# Altium PCB PCB1.PcbDoc
Units mm, origin at the board's own origin, x right, y up, seen from the top; angles counter-clockwise.
Board outline 60 x 47.5 mm, 4 copper layers (Top Layer, GND1, GND2, Bottom Layer), stack 1.57 mm thick; 73 components, 58 nets, 277 pads, 166 vias.
Unrouted connection lines stored in the file: 8.
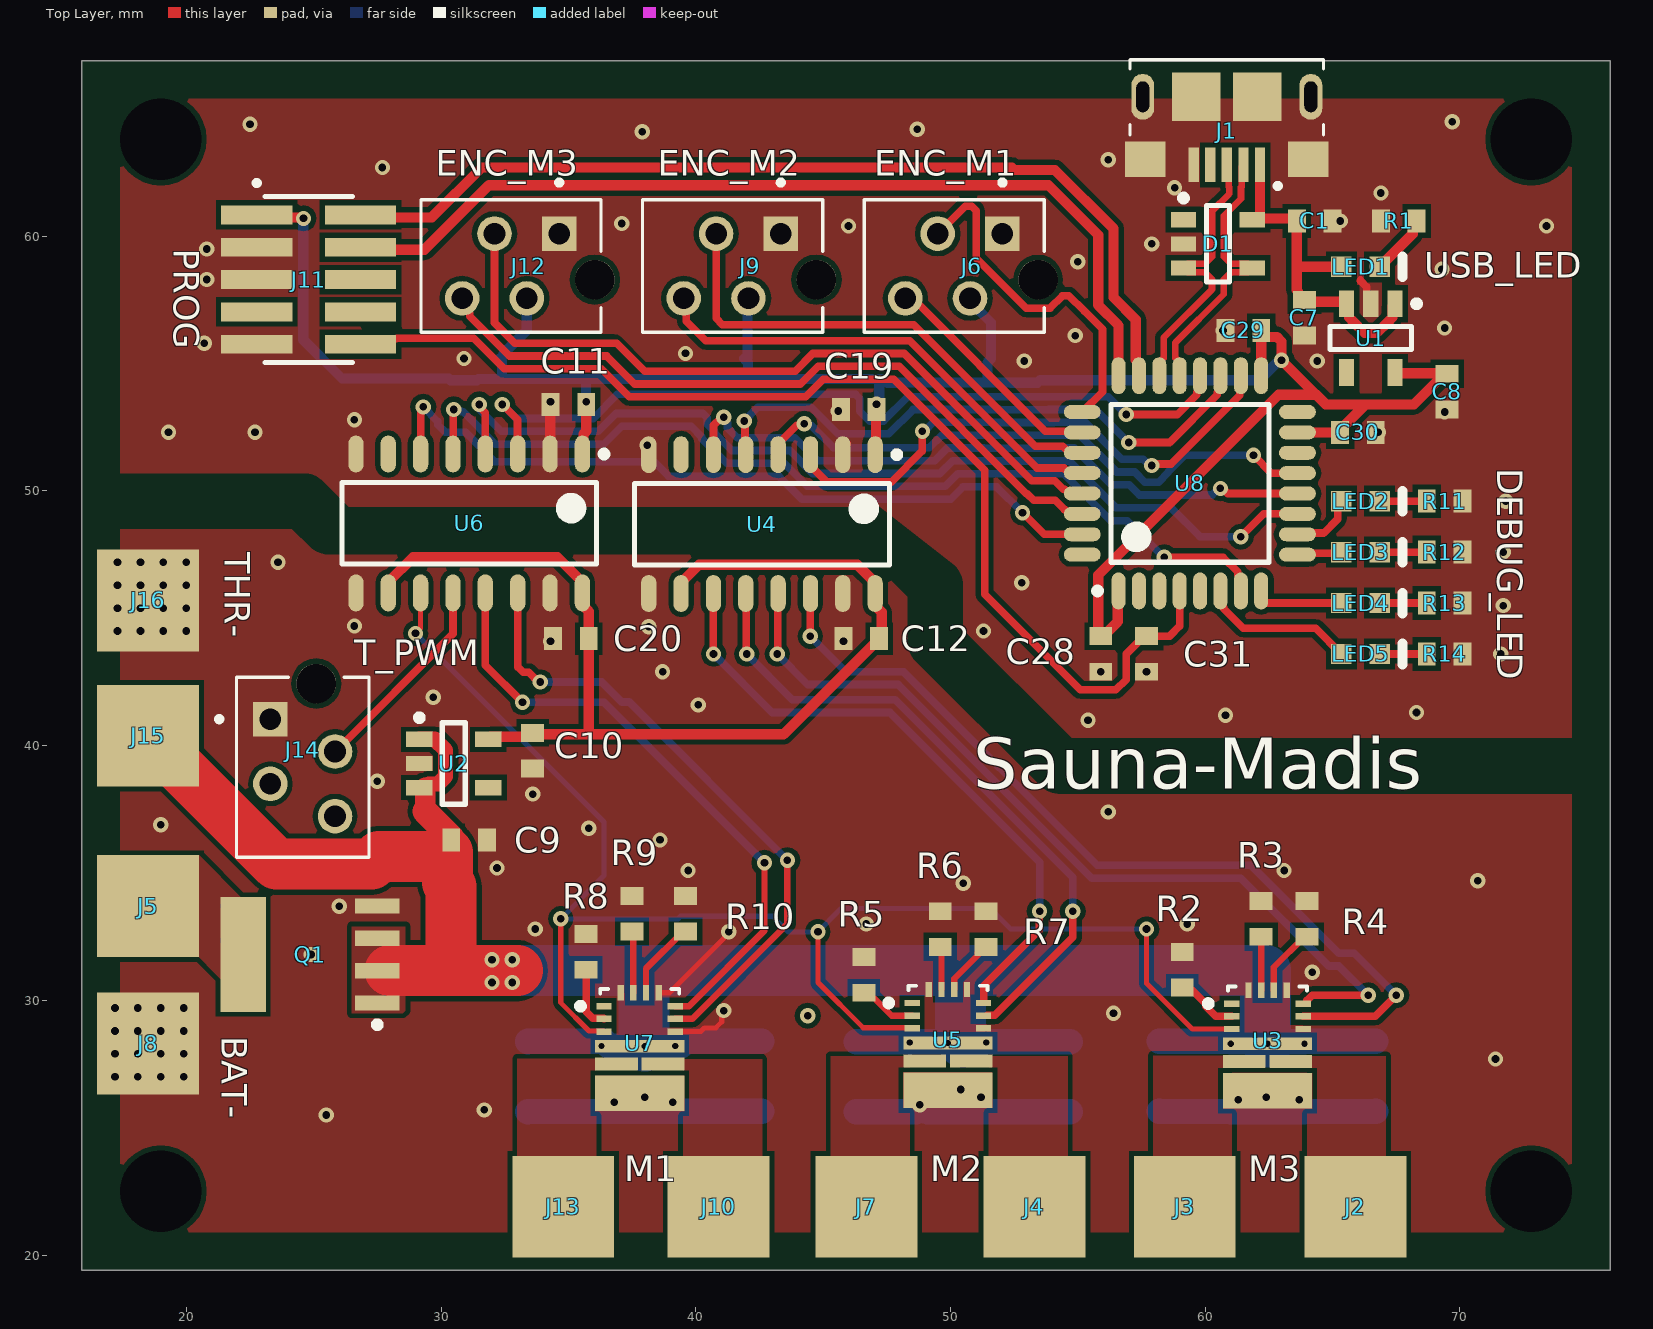
[diagram p0: Top Layer view]
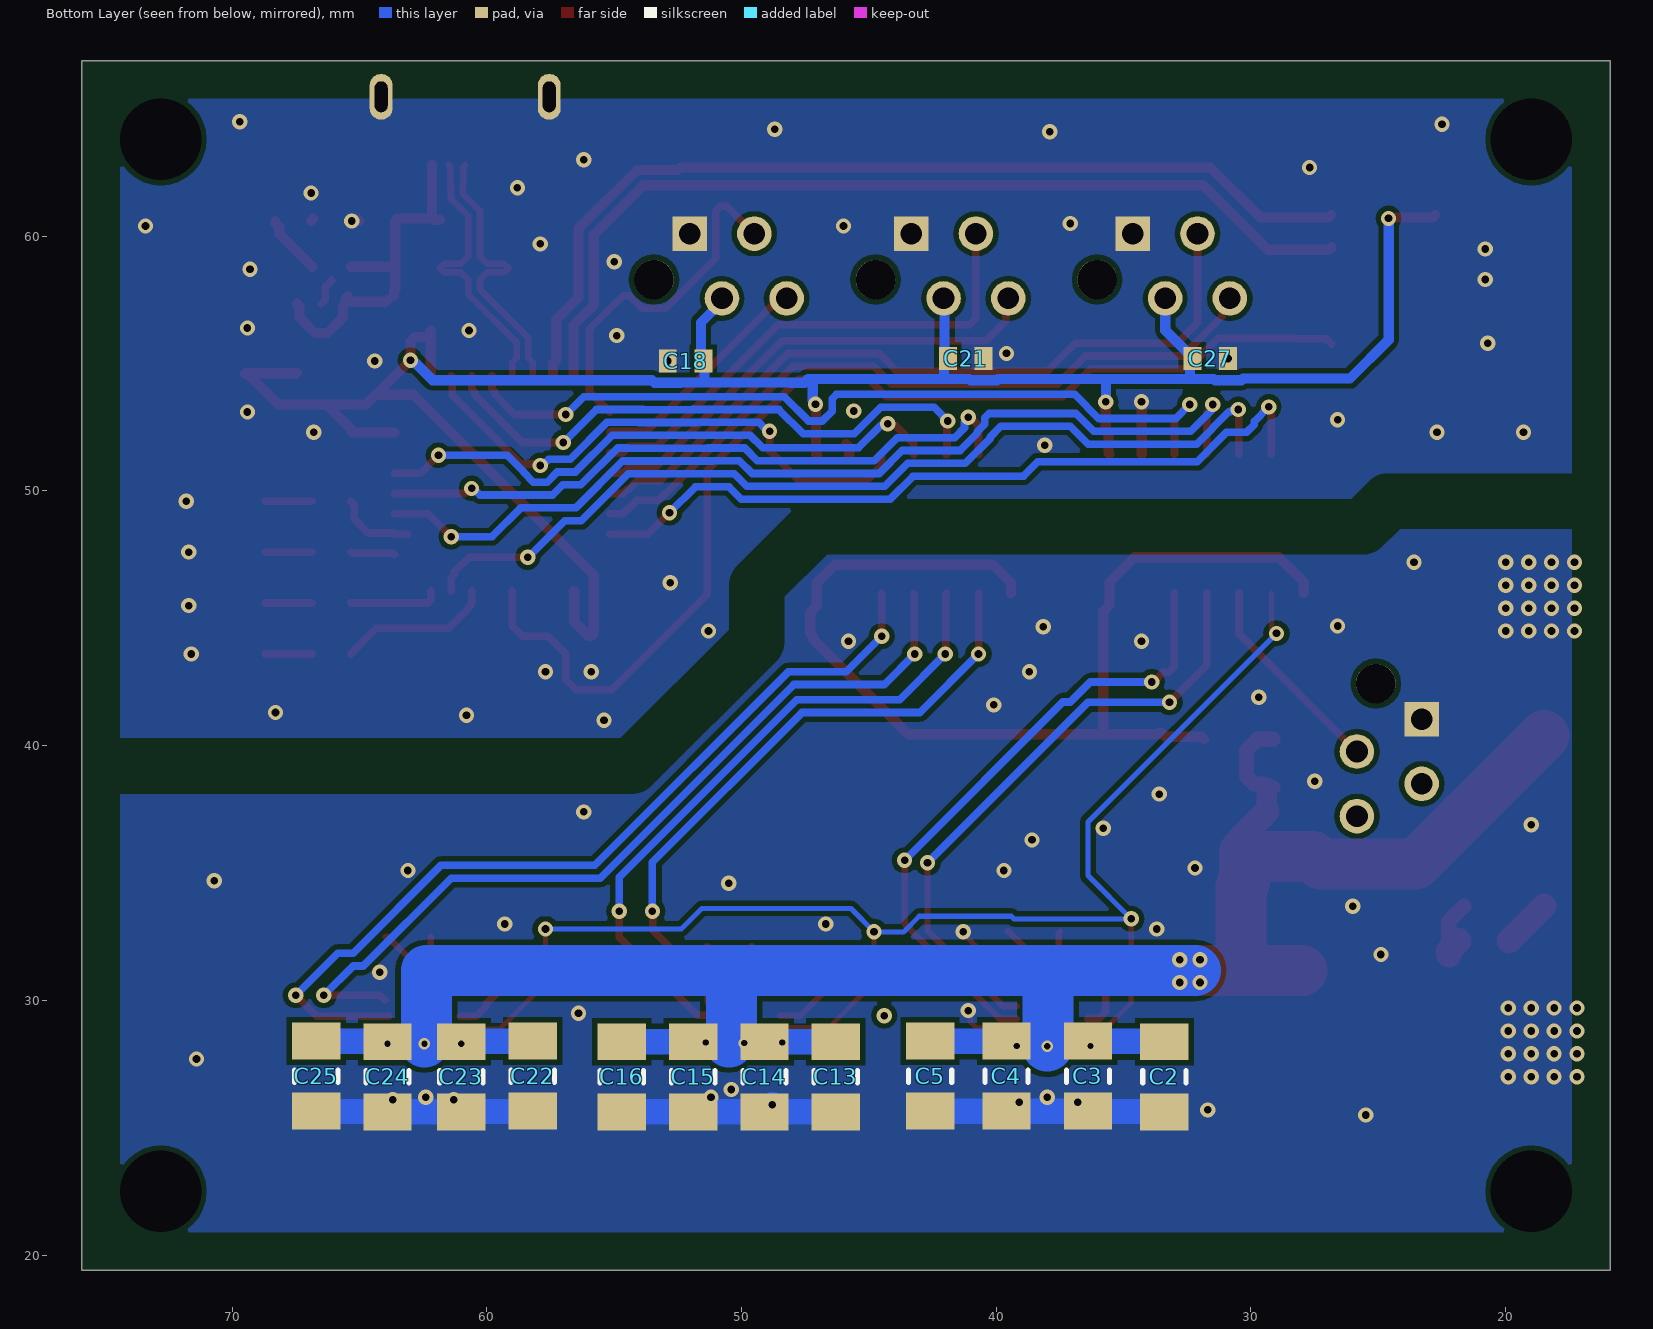
[diagram p1: Bottom Layer view, seen from below]
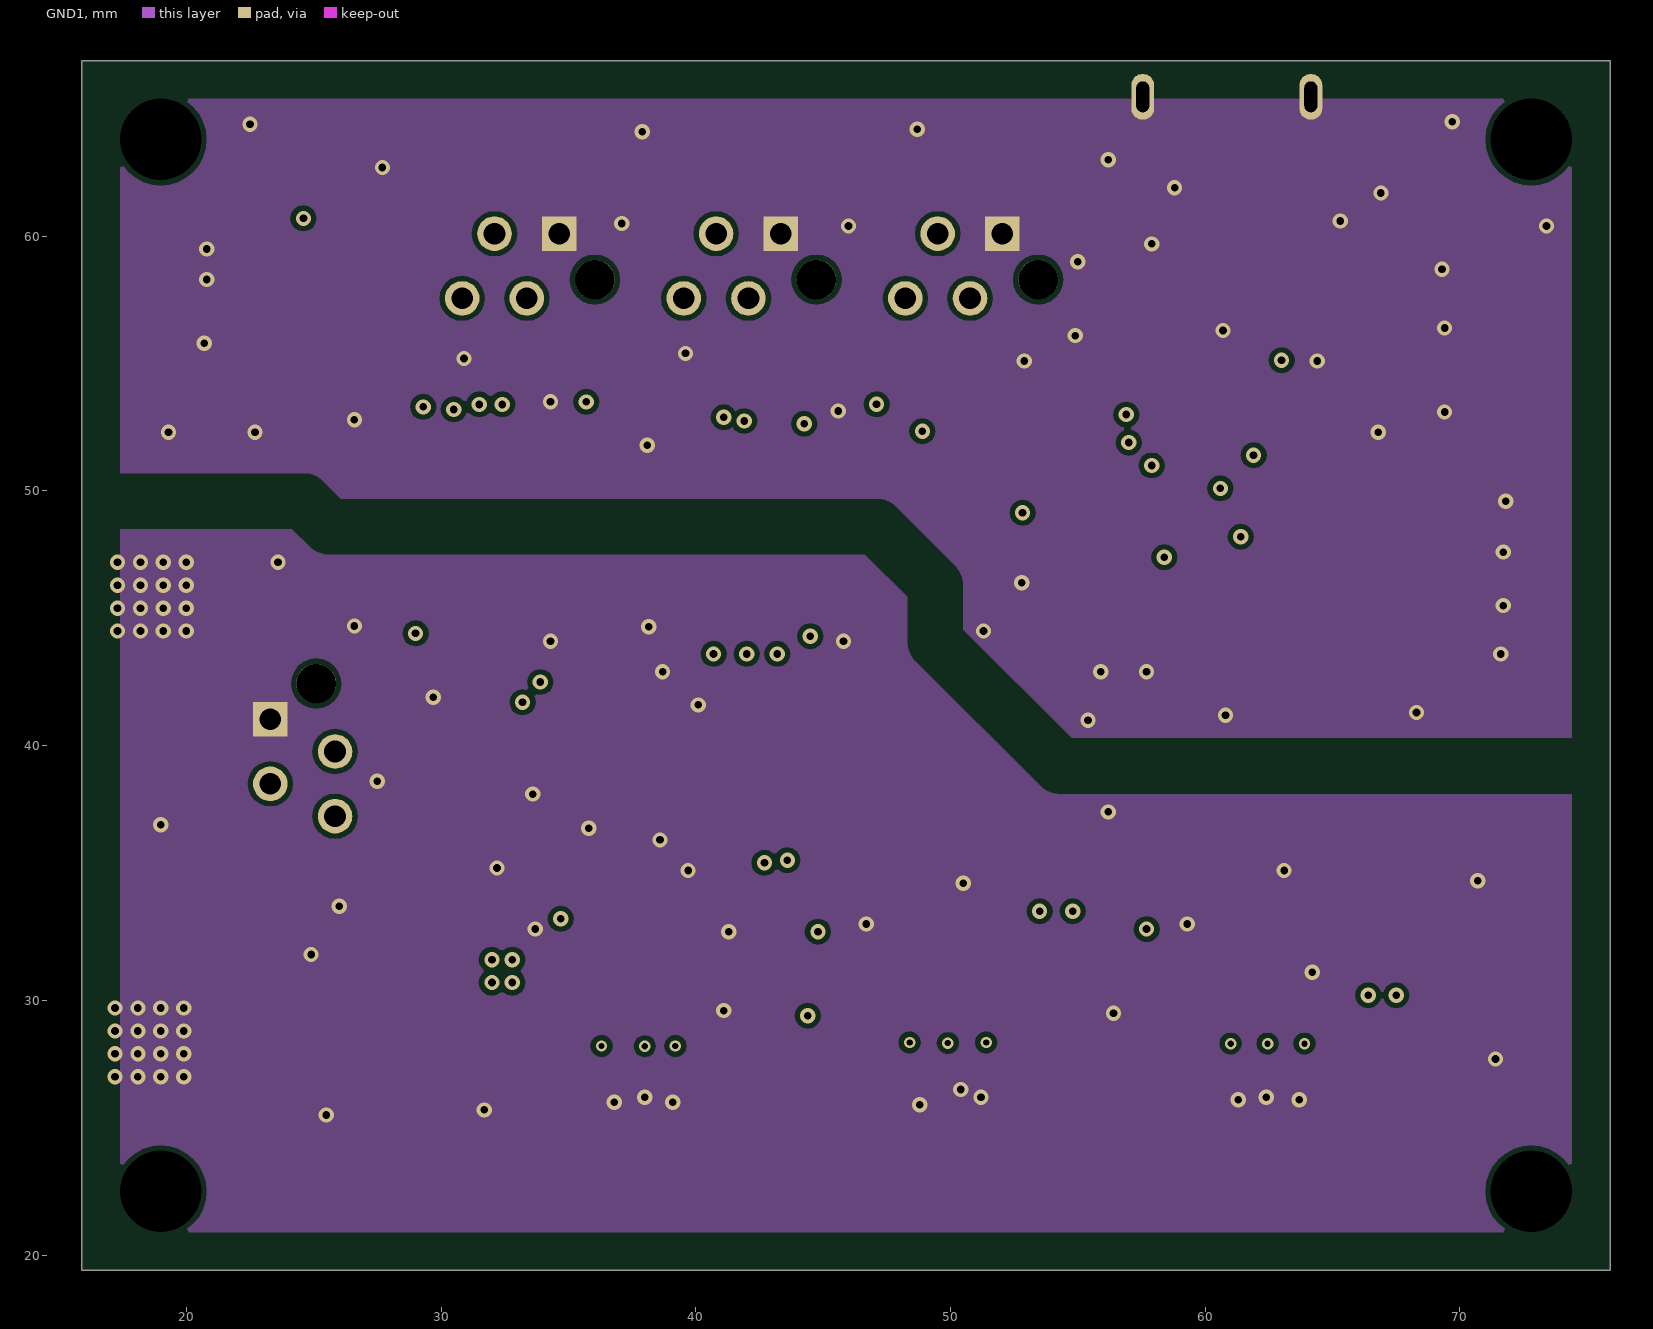
[diagram p2: GND1]
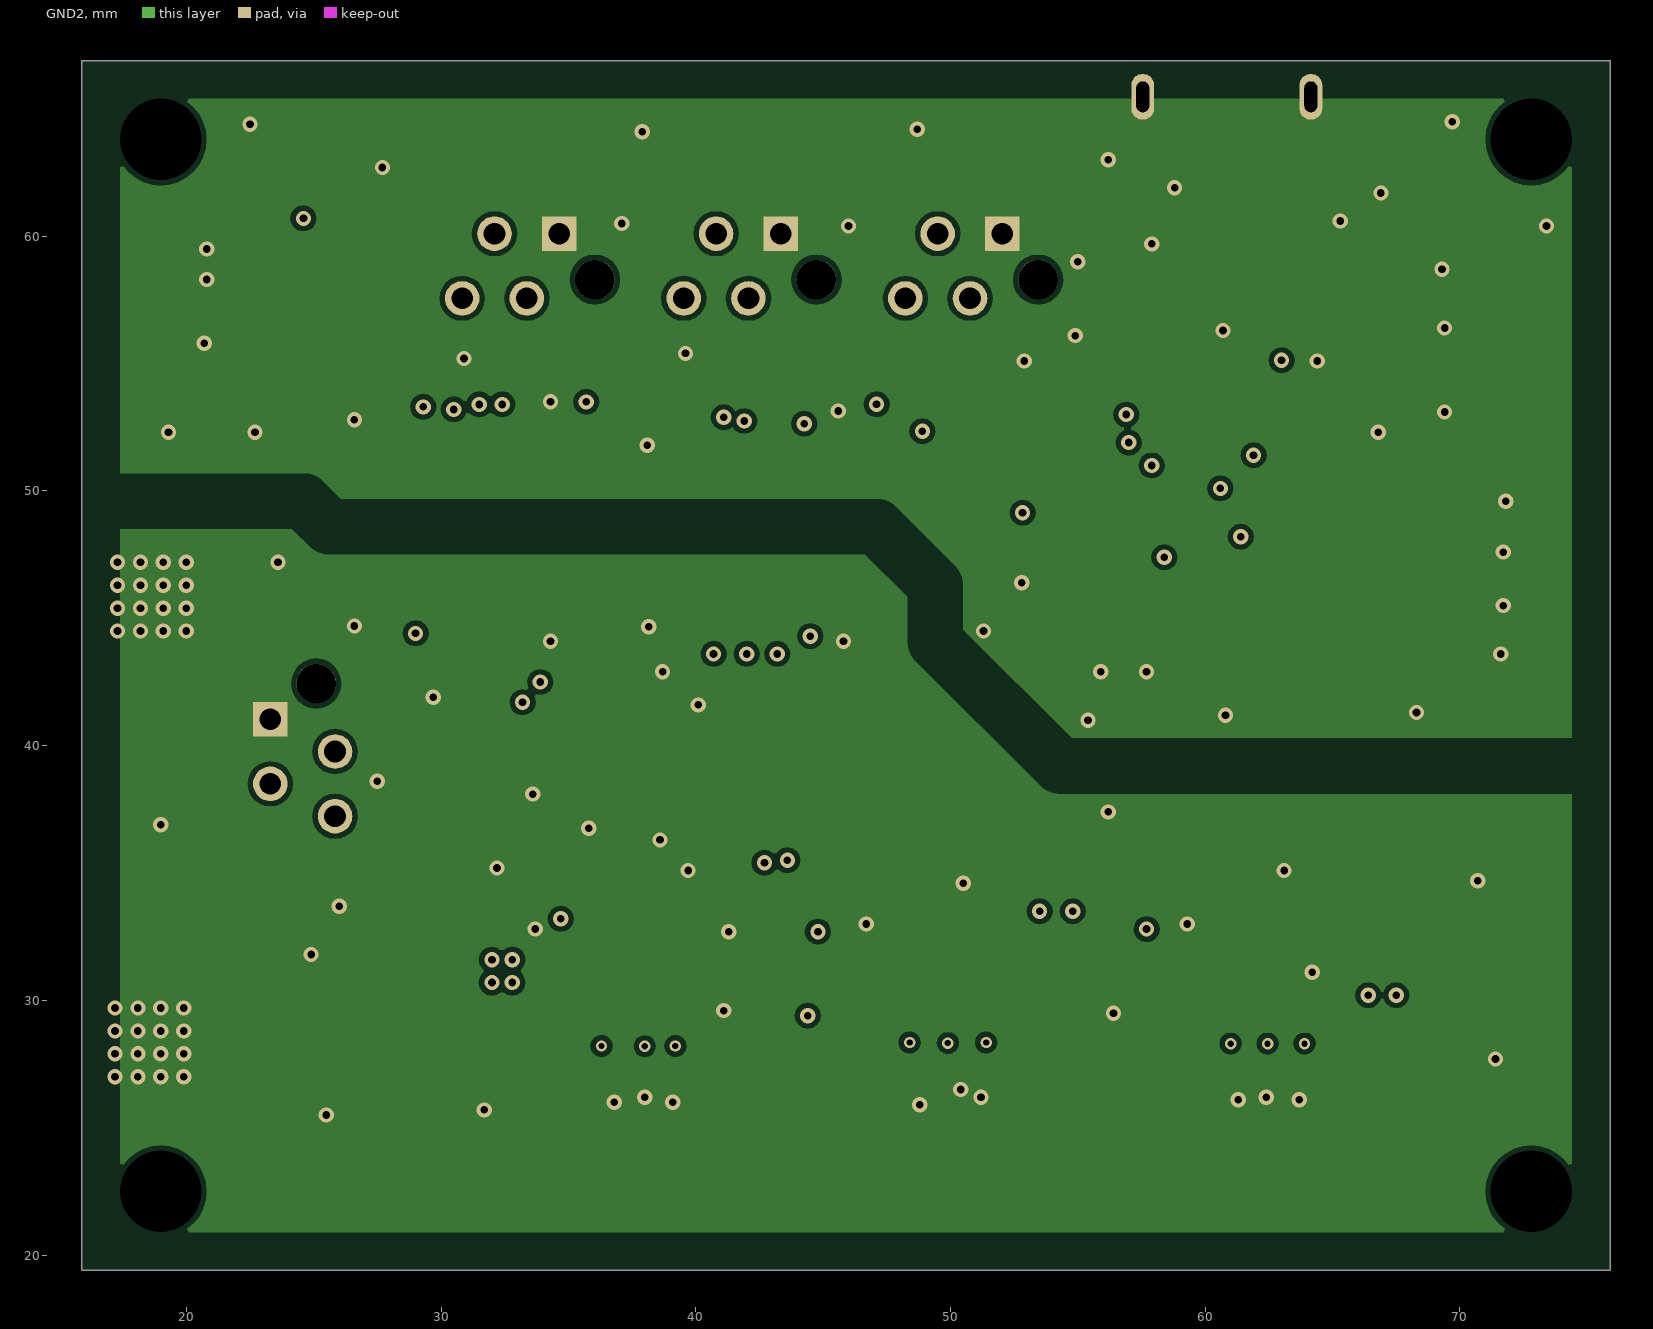
[diagram p3: GND2]
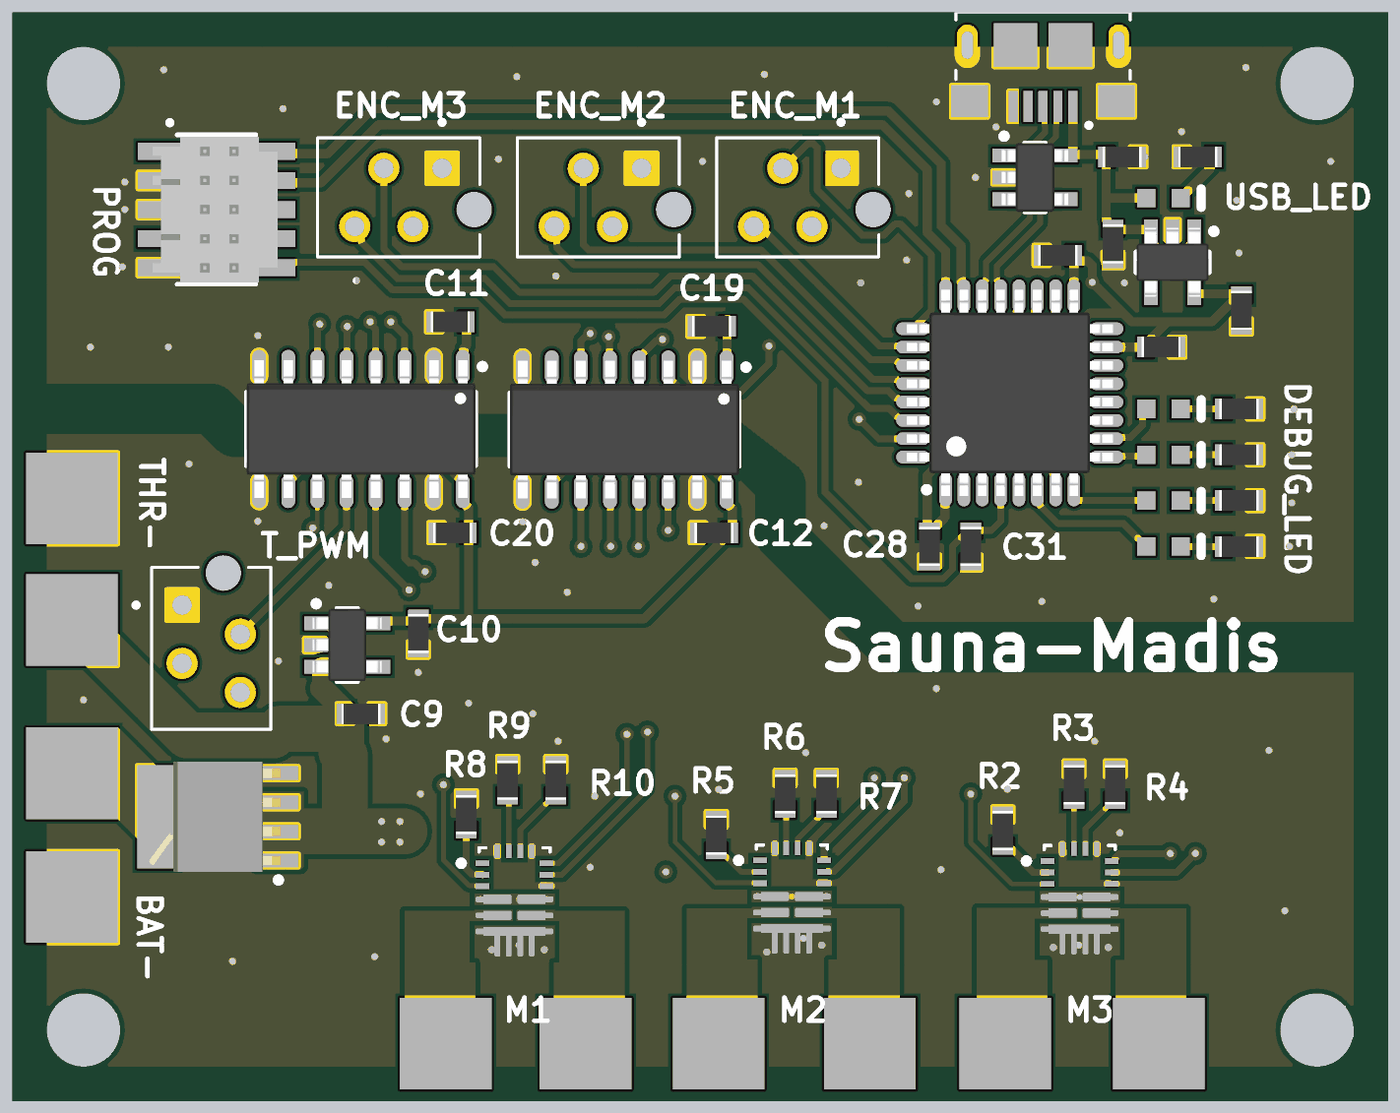
[diagram p4: 3D render of the assembled board from above, using the file's embedded part models]
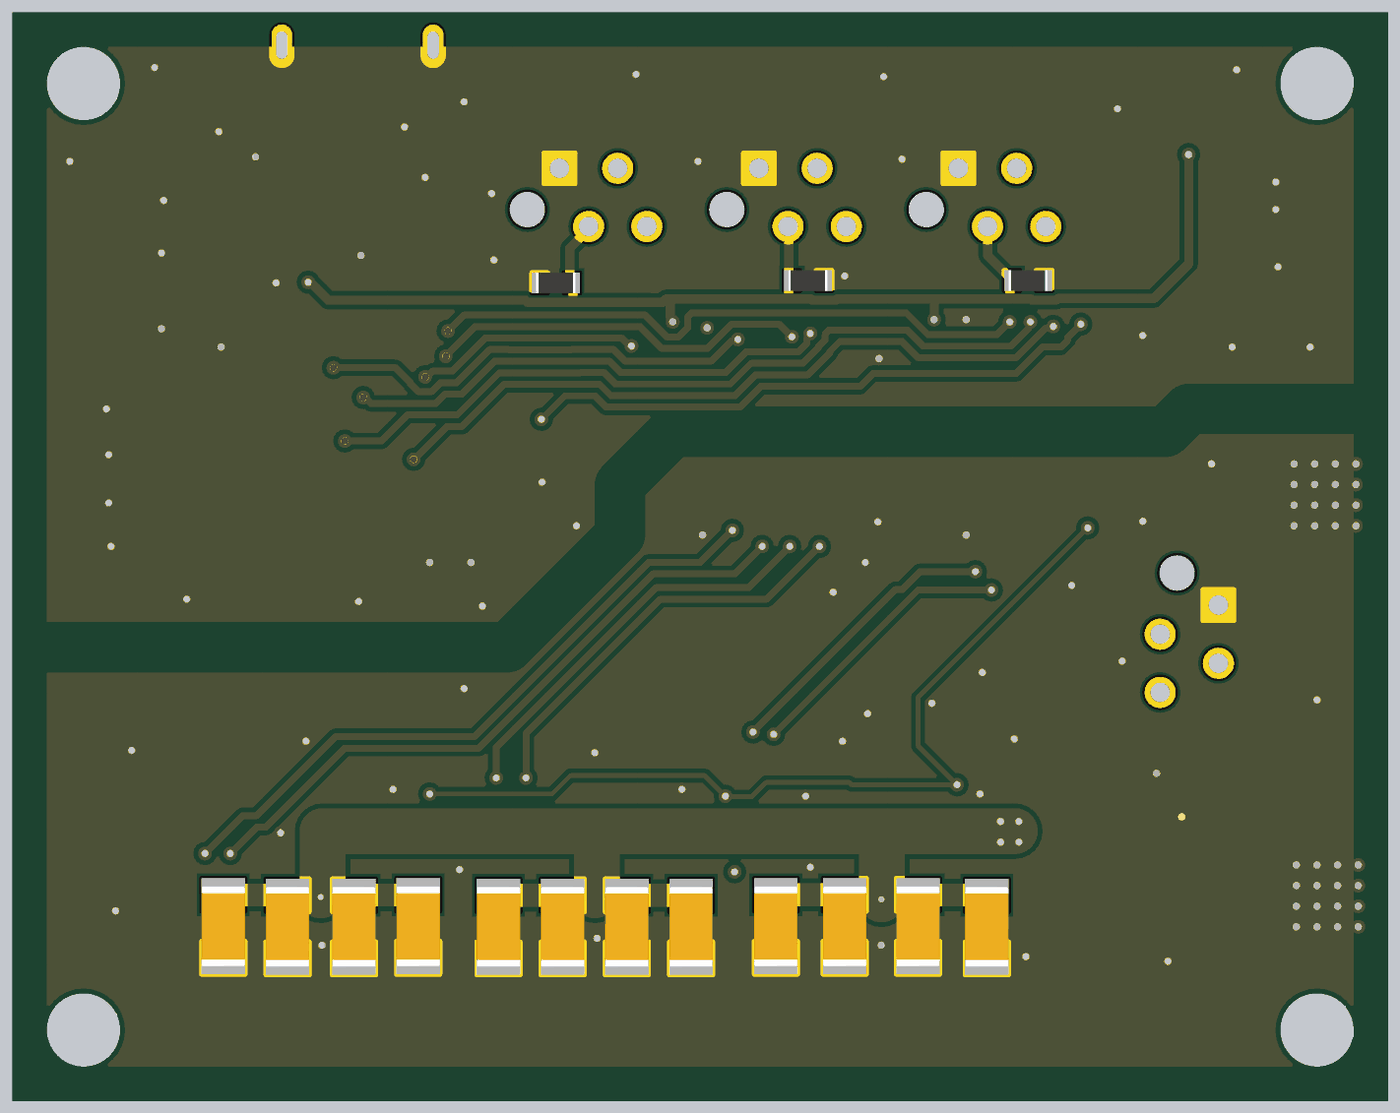
[diagram p5: 3D render of the assembled board from below, using the file's embedded part models]

## Layer stack, top to bottom
Top Solder: solder mask 0.0102, Solder Resist, Dk 3.8
Top Layer: signal copper 0.035
Dielectric 2: prepreg 0.2, PP-006, Dk 4.6
GND1: signal copper 0.0175
Dielectric 1: core 1.065, FR-4, Dk 4.6
GND2: signal copper 0.0175
Dielectric 3: prepreg 0.2, PP-006, Dk 4.6
Bottom Layer: signal copper 0.035
Bottom Solder: solder mask 0.0102, Solder Resist, Dk 3.8

## Board outline
15.9,19.4 75.9,19.4 75.9,66.9 15.9,66.9

## Design rules (kind name [scope] priority, off if disabled: settings)
BoardOutlineClearance [All] p1: gap=0.2 ignorepadtopadclearanceinfootprint=FALSE except(0.4: Arc-SplitBarrior Arc-SplitContinuation Track-SplitBarrior Track-SplitContinuation SMDPad-SplitBarrior SMDPad-SplitContinuation THPad-SplitBarrior THPad-SplitContinuation Via-SplitBarrior Via-SplitContinuation Fill-SplitBarrior Fill-SplitContinuation Poly-SplitBarrior Poly-SplitContinuation Region-SplitBarrior Region-SplitContinuation Text-SplitBarrior Text-SplitContinuation)
Clearance "Clearance Bottom Layer" [OnLayer('Bottom Layer')] p1: gap=0.203 ignorepadtopadclearanceinfootprint=TRUE except(0.254: Arc-Text Track-Text SMDPad-Text THPad-Text Via-Text Fill-Text Poly-Text Region-Text Text-Text)
Clearance "Clearance Top Layer" [OnLayer('Top Layer')] p2: gap=0.2 ignorepadtopadclearanceinfootprint=TRUE except(0.254: Arc-Text Track-Text SMDPad-Text THPad-Text Via-Text Fill-Text Poly-Text Region-Text Text-Text)
Clearance [All] p3: gap=0.2 ignorepadtopadclearanceinfootprint=FALSE except(0.089: Arc-Arc Arc-Track Arc-SMDPad Track-Track Track-SMDPad SMDPad-SMDPad; 0.127: Arc-Via Track-Via SMDPad-Via THPad-Via Via-Via; 0.254: Arc-Text Track-Text SMDPad-Text THPad-Text Via-Text Fill-Text Poly-Text Region-Text Text-Text)
DiffPairsRouting [InDifferentialPair('USB_D')] p1: maxlimit=0.203 minlimit=0.203 mostfreqgap=0.203 toplayer_minwidth=0.26 toplayer_maxwidth=0.26 toplayer_prefwidth=0.26 midlayer1_minwidth=0.26 midlayer1_maxwidth=0.26 midlayer1_prefwidth=0.26 midlayer2_minwidth=0.26 midlayer2_maxwidth=0.26 midlayer2_prefwidth=0.26 bottomlayer_minwidth=0.26 bottomlayer_maxwidth=0.26 bottomlayer_prefwidth=0.26 maxuncoupledlength=12.7
HoleSize [All] p1: absolutevalues=TRUE maxlimit=6.3 minlimit=0.2 maxpercent=80.000 minpercent=20.000
MinimumAnnularRing [All] p1: minimumring=0.076
MinimumSolderMaskSliver [All] p1: minsoldermaskwidth=0.1
PolygonConnect PolygonConnect_1 [All] p1: connectstyle=Direct reliefconductorwidth=0.508 reliefentries=4 polygonreliefangle="90 Angle" airgapwidth=0.254
RoutingCorners [All] p1: cornerstyle=Round minsetback=2.54 maxsetback=2.54
RoutingVias [All] p1: holewidth=0.5 width=1 viastyle="Through Hole" minholewidth=0.2 minwidth=0.45 maxholewidth=1 maxwidth=2
ShortCircuit [All] p1: allowed=TRUE
SilkToSilkClearance [All] p1: silktosilkclearance=0.1
SilkToSolderMaskClearance [IsPad] p1: minsilkscreentomaskgap=0.15 clearancetoexposedcopper=TRUE
SolderMaskExpansion [All] p1: expansion=0.102 istentingtop=FALSE
Width [All] p1: maxlimit=2.54 minlimit=0.089 preferedwidth=0.381
23 further rules are at their usual default settings.

## Classes and differential pairs
differential pair USB_D: +USB_D_P -USB_D_N

## Components (designator, comment, footprint, x,y, rotation, side; value= is the part's Value field where it differs from the comment)
C1 "0603C" 0603R 64.3,60.6 r0 top
C2 "0603C" "1206 cap" 33.4,27 r270 bottom
C3 "0603C" "1206 cap" 36.4,27.025 r270 bottom
C4 "0603C" "1206 cap" 39.6,27.025 r270 bottom
C5 "0603C" "1206 cap" 42.6,27.025 r270 bottom
C7 "0603C" 0603R 63.9,56.8 r90 top
C8 "0603C" 0603R 69.5,53.9 r90 top
C9 "0603C" 0603R 31.1,36.3 r180 top
C10 "0603C" 0603R 33.6,39.8 r90 top
C11 "0603C" 0603R 35,53.4 r180 top
C12 "0603C" 0603R 46.5,44.2 r0 top
C13 "0603C" "1206 cap" 46.3,27 r270 bottom
C14 "0603C" "1206 cap" 49.1,27 r270 bottom
C15 "0603C" "1206 cap" 51.9,27 r270 bottom
C16 "0603C" "1206 cap" 54.7,27 r270 bottom
C18 "0603C" 0603R 52.2,55.1 r0 bottom
C19 "0603C" 0603R 46.4,53.2 r180 top
C20 "0603C" 0603R 35.1,44.2 r0 top
C21 "0603C" 0603R 41.2,55.2 r180 bottom
C22 "0603C" "1206 cap" 58.2,27.025 r270 bottom
C23 "0603C" "1206 cap" 61,27 r270 bottom
C24 "0603C" "1206 cap" 63.9,27 r270 bottom
C25 "0603C" "1206 cap" 66.7,27.025 r270 bottom
C27 "0603C" 0603R 31.6,55.2 r180 bottom
C28 "0603C" 0603R 55.9,43.6 r270 top
C29 "0603C" 0603R 61.5,56.3 r180 top
C30 "0603C" 0603R 66,52.3 r0 top
C31 "0603C" 0603R 57.7,43.6 r270 top
D1 "CM1223-02SO" CM1223-02SO 60.5,59.7 r0 top
J1 "10118193-0001LF" FCI_10118193-0001LF 60.85,65.475 r180 top
J2 "Pad" Pad 65.9,21.9 r0 top
J3 "Pad" Pad 59.2,21.9 r0 top
J4 "Pad" Pad 53.3,21.9 r0 top
J5 "Pad" Pad 18.5,33.7 r0 top
J6 "ENC_M1" TE_7-215079-4 52.04,60.1 r0 top
J7 "Pad" Pad 46.7,21.9 r0 top
J8 "Pad" Pad 18.5,28.3 r90 top
J9 "ENC_M2" TE_7-215079-4 43.34,60.1 r0 top
J10 "Pad" Pad 40.9,21.9 r0 top
J11 "FTSH-105-XX-X-DV" SAMTEC_FTSH-105-XX-X-DV 24.8,58.3 r270 top
J12 "ENC_M3" TE_7-215079-4 34.64,60.1 r0 top
J13 "Pad" Pad 34.8,21.9 r0 top
J14 "THR_PWM" TE_7-215079-4 23.3,41.04 r90 top
J15 "Pad" Pad 18.5,40.392 r270 top
J16 "Pad" Pad 18.5,45.7 r270 top
LED1 "LED" LEDwhite0603 66.1,58.8 r0 top
LED2 "LED" LEDwhite0603 66.1,49.6 r0 top
LED3 "LED" LEDwhite0603 66.1,47.6 r0 top
LED4 "LED" LEDwhite0603 66.1,45.6 r0 top
LED5 "LED" LEDwhite0603 66.1,43.6 r0 top
Q1 "BUK6Y10-30P" BUK6Y10-30P 24.9,31.8 r180 top
R1 "0603R" 0603R 67.6,60.6 r180 top
R2 "0603R" 0603R 59.1,31.2 r270 top
R3 "0603R" 0603R 62.2,33.2 r90 top
R4 "0603R" 0603R 64,33.2 r90 top
R5 "0603R" 0603R 46.6,31 r270 top
R6 "0603R" 0603R 49.6,32.8 r90 top
R7 "0603R" 0603R 51.4,32.8 r90 top
R8 "0603R" 0603R 35.7,31.9 r270 top
R9 "0603R" 0603R 37.5,33.4 r90 top
R10 "0603R" 0603R 39.6,33.4 r90 top
R11 "0603R" 0603R 69.4,49.6 r180 top
R12 "0603R" 0603R 69.4,47.6 r180 top
R13 "0603R" 0603R 69.4,45.6 r180 top
R14 "0603R" 0603R 69.4,43.6 r180 top
U1 "NCP164CSN330T1G" NCP164CSN330T1G/NCV8730ASN500T1G 66.5,56 r270 top
U2 "NCV8730ASN500T1G" NCP164CSN330T1G/NCV8730ASN500T1G 30.5,39.3 r0 top
U3 "PDRV8243HRXYQ1" PDRV8243HRXYQ1 62.577,27.996 r0 top
U4 "MAX14930DASE+" MAX14930DASE+ 42.6,48.7 r270 top
U5 "PDRV8243HRXYQ1" PDRV8243HRXYQ1 50.027,28.021 r0 top
U6 "MAX14930DASE+" MAX14930DASE+ 31.105,48.725 r270 top
U7 "PDRV8243HRXYQ1" PDRV8243HRXYQ1 37.927,27.896 r0 top
U8 "STM32G441KB" TQFP80P900X900X160-32N 59.4,50.3 r90 top

## Footprints (in the part's own frame and the unit in brackets; to place one, negate y for a bottom-side part, rotate by r counter-clockwise, add the part's x,y. Pads: shape width x height; smd on the part's side, far side on the other; paste and mask are expansions set on the pad)
0603R [mm]
  rect 0.7x0.9 smd: 1(-0.7,0) 2(0.7,0)
  body extent -0.85,-0.45 0.85,0.45, height 0.55
"1206 cap" [mm] "Chip Capacitor, 2-Leads, Body 3.5x1.9mm, IPC Medium Density"
  rect 1.45x1.9 smd: 1(-1.375,0) 2(1.375,0)
  silkscreen extent -0.25,-0.85 0.25,0.85, body extent -1.75,-0.95 1.75,0.95, height 1.9
BUK6Y10-30P [mm] "TO, 5-Pads, Body 5,15x5,86mm (max), IPC Medium Density"
  rect 1.75x0.6 smd: 1(-2.6,1.905) 2(-2.6,0.635) 3(-2.6,-0.635) 4(-2.6,-1.905)
  rect 1.78x4.5 smd: 5(2.667,0)
  silkscreen extent -2.73,2.63 -2.48,2.88, body extent -3.07,-2.4 3.04,2.4, height 0.75
CM1223-02SO [mm] "diode array"
  rect 1x0.6 smd: 1(-1.35,0.95) 2(-1.35,0) 3(-1.35,-0.95) 4(1.35,-0.95) 5(1.35,0.95)
  silkscreen extent -1.47,-1.5 0.45,1.92, body extent -1.45,-1.5 1.45,1.5, height 1.45
FCI_10118193-0001LF [mm]
  rect 0.4x1.35 smd: 1(-1.3,2.675) 2(-0.65,2.675) 3(0,2.675) 4(0.65,2.675) 5(1.3,2.675)
  rect 1.6x1.4 smd: S1(-3.2,2.45) S2(3.2,2.45)
  rect 1.9x1.9 smd: S3(1.2,0) S4(-1.2,0)
  oval 0.9x1.8 hole 0.5 slot 1.2 at 90 deg: S5(-3.3,0) S6(3.3,0)
  round 0.5 hole 0.5 unplated: ""(-3.3,0) ""(3.3,0)
  silkscreen extent -3.8,-1.45 3.8,3.6
LEDwhite0603 [mm]
  rect 0.8x0.8 smd: 1(-0.75,0) 2(0.75,0)
  silkscreen extent 1.65,-0.4 1.65,0.4, body extent -0.8,-0.4 0.8,0.4, height 0.65
MAX14930DASE+ [mm] "SOIC, 16-Leads, Body 9,90x3,90mm, Pitch 1,27mm, IPC Medium Density"
  oval 1.45x0.6 smd: 1(-2.725,4.445) 2(-2.725,3.175) 3(-2.725,1.905) 4(-2.725,0.635) 5(-2.725,-0.635) 6(-2.725,-1.905) 7(-2.725,-3.175) 8(-2.725,-4.445) 9(2.725,-4.445) 10(2.725,-3.175) 11(2.725,-1.905) 12(2.725,-0.635) 13(2.725,0.635) 14(2.725,1.905) 15(2.725,3.175) 16(2.725,4.445)
  silkscreen extent -2.85,-5 1.6,5.42, body extent -3,-5 3,5, height 1.75
NCP164CSN330T1G/NCV8730ASN500T1G [mm] "voltage regulators"
  rect 1.05x0.6 smd: 1(-1.35,0.95) 2(-1.35,0) 3(-1.35,-0.95) 4(1.35,-0.95) 5(1.35,0.95)
  silkscreen extent -1.47,-1.6 0.45,1.93, body extent -1.5,-1.58 1.5,1.58, height 1.1
Pad [mm]
  rect 4x4 smd: 1(0,0)
PDRV8243HRXYQ1 [mm]
  rect 0.6x0.25 smd paste+0 mask-0.292: 1(-1.527,1.879) 2(-1.527,1.379) 3(-1.527,0.879) 8(1.273,0.879) 9(1.273,1.379) 10(1.273,1.879)
  rect 3.5x0.5 smd paste-1.737 mask-1.74: 4(-0.127,0.304)
  rect 1.675x0.5 smd paste-0.825 mask-0.826: 5(-1.04,-0.396) 7(0.786,-0.396)
  rect 3.5x1.4 smd paste-1.737 mask-1.74: 6(-0.127,-1.546)
  rect 0.25x0.6 smd paste+0 mask-0.292: 11(0.623,2.404) 12(0.123,2.404) 13(-0.377,2.404) 14(-0.877,2.404)
  silkscreen extent -2.58,1.75 1.42,2.55
SAMTEC_FTSH-105-XX-X-DV [mm]
  rect 0.74x2.79 smd: 01(-2.54,-2.035) 02(-2.54,2.035) 03(-1.27,-2.035) 04(-1.27,2.035) 05(0,-2.035) 06(0,2.035) 07(1.27,-2.035) 08(1.27,2.035) 09(2.54,-2.035) 10(2.54,2.035)
  silkscreen extent -3.89,-2.13 3.26,1.72, body extent -3.18,-2.79 3.18,3.05, height 5.71
TE_7-215079-4 [mm]
  rect 1.358x1.358 hole 0.85: 1(0,0)
  round 1.358 hole 0.85: 2(-1.27,-2.54) 3(-2.54,0) 4(-3.81,-2.54)
  round 1.55 hole 1.55 unplated: ""(1.4,-1.8)
  silkscreen extent -5.43,-3.87 1.65,2.11
TQFP80P900X900X160-32N [mm] "TQFP, 32-Leads, Body 7,00x7,00mm, Pitch 0,80mm, IPC Medium Density"
  oval 1.45x0.55 smd: 1(-4.225,2.8) 2(-4.225,2) 3(-4.225,1.2) 4(-4.225,0.4) 5(-4.225,-0.4) 6(-4.225,-1.2) 7(-4.225,-2) 8(-4.225,-2.8) 17(4.225,-2.8) 18(4.225,-2) 19(4.225,-1.2) 20(4.225,-0.4) 21(4.225,0.4) 22(4.225,1.2) 23(4.225,2) 24(4.225,2.8)
  oval 0.55x1.45 smd: 9(-2.8,-4.225) 10(-2,-4.225) 11(-1.2,-4.225) 12(-0.4,-4.225) 13(0.4,-4.225) 14(1.2,-4.225) 15(2,-4.225) 16(2.8,-4.225) 25(2.8,4.225) 26(2,4.225) 27(1.2,4.225) 28(0.4,4.225) 29(-0.4,4.225) 30(-1.2,4.225) 31(-2,4.225) 32(-2.8,4.225)
  silkscreen extent -4.35,-3.1 3.1,3.75, body extent -4.5,-4.5 4.5,4.5, height 1.6

## Part data
C1 C2 C3 C4 C5 C7 C8 C9 C10 C11 C12 C13 C14 C15 C16 C18 C19 C20 C21 C22 C23 C24 C25 C27 C28 C29 C30 C31: "Capacitor"
  C1 C11 C12 C18 C19 C20 C21 C27 C28 C29 C30 C31: c=100n
  C2 C3 C4 C5 C13 C14 C15 C16 C22 C23 C24 C25: c=10u
  C7 C8 C9 C10: c=1u
D1: "TVS diode"
J1: "USB - micro B USB 2.0 Receptacle Connector 5 Position Surface Mount, Right Angle; Through Hole", Package=None, Availability=Unavailable, MF="Amphenol ICC", MP=10118193-0001LF, Price=None, SnapEDA_Link=https://www.snapeda.com/parts/10118193-0001LF/Amphenol%20FCI/view-part/2758989/?ref=snap
J2 J3 J4 J5 J7 J8 J10 J13 J15 J16: "PAD"
  J2: Name=M1_O1
  J3: Name=M1_O2
  J4: Name=M2_O1
  J5: Name=BAT+
  J7: Name=M2_O2
  J8: Name=BAT-
  J10: Name=M3_O1
  J13: Name=M3_O2
  J15: Name=THR+
  J16: Name=THR-
J6 J9 J12 J14: library part 7-215079-4, "Micro-MaTch 4 Position 1.27 mm Pitch Vertical Female-on-Board Connector", Package=SMD-6, Availability=Unavailable, MF="TE Connectivity", MP=7-215079-4, Price=None, SnapEDA_Link=https://www.snapeda.com/parts/7-215079-4/TE%20Connectivity%20AMP%20Connectors/view-part/453401/?ref=snap
J11: "Connector Header Surface Mount 10 position 0.050\" (1.27mm)", Package=None, Availability=Unavailable, MP=FTSH-105-XX-X-DV, Price=None
LED1 LED2 LED3 LED4 LED5: "led", color=Green
Q1: "Reverse voltage protection"
R1: "resistor", RESISTANCE=1k
R2 R5 R8 R11 R12 R13 R14: "resistor", RESISTANCE=3.3k
R3 R4 R6 R7 R9 R10: "resistor", RESISTANCE=100k
U1: "Voltage regulator for microcontroller"
U2: "Voltage regulator at the motor driver’s side"
U3 U5 U7: "Motor driver"
U4 U6: "isolator"
U8: "microcontroller"

## Free pads (board coordinates)
  round 0.1 hole 3.2 unplated: M(19,22.5) M(19,63.8) M(72.8,22.5)
  round 0.1 hole 3.2 unplated mask-0.5: M(72.8,63.8)

## Via types
v1: diameter 0.6, hole 0.3, Top Layer to Bottom Layer, 148 vias
v2: diameter 0.6, hole 0.3, Top Layer to Bottom Layer, tented both sides, 9 vias
v3: diameter 0.45, hole 0.25, Top Layer to Bottom Layer, 9 vias

## Nets (pads, with @x,y where several pads share a name; then routed paths per layer and width w, separated by ;. In a path a pad name is that pad's centre, name@x,y a point inside that pad or via, vN(x,y) a via of type N, cw(c..) or ccw(c..) an arc to the next point about the centre after c; other vN are vias at no path point)
+3V3: C8.2 C11.1 C18.1 C19.1 C21.1 C27.1 C28.1 C29.1 C30.1 J6.2 J9.2 J11.01 J12.2 U1.5 U4.1 U6.1 U8.1 U8.15 U8.17 | length 94.9
  Top Layer w0.3: C30.1 C30.1@65.3,52.4
  Top Layer w0.4: J11.01 22.867,60.738 24.562,60.738 v1(24.6,60.7) ; U6.1 35.588,51.488 35.588,52.238 35.7,52.35 C11.1 v1(35.7,53.496) ; U4.1 47.072,51.453 47.072,53.172 C19.1 v1(47.1,53.4) ; U8.1 56.571,46.046 56.571,44.871 56,44.3 C28.1 55.8,44.4 55.8,46.7 62.878,53.778 64.351,53.778 ; U8.17 C29.1@62.2,56.2 ; C29.1 C29.1@62.2,56.2 ; U8.15 C30.1 ; C30.1@65.3,52.4 66.3,53.4 ; U1.5 67.475,54.625 69.475,54.625 C8.2 69.4,54.6 68.2,53.4 66.3,53.4 ; C29.1@62.2,56.2 62.35,56.05 62.816,56.05 63,55.866 v1(63,55.13) 64.351,53.778 ; 64.351,53.778 64.355,53.775 64.359,53.775 64.734,53.4 66.3,53.4
  Bottom Layer w0.4: v1(24.6,60.7) 24.594,60.694 24.594,55.935 26.111,54.418 30.312,54.418 30.383,54.347 31.417,54.347 31.47,54.4 32.4,54.4 ; C27.1 32.4,55.1 32.4,54.4 ; C27.1@32.45,55.391 33.364,56.305 J12.2@33.364,57.554 ; v1(35.7,53.496) 35.694,53.502 35.694,54.4 ; C21.1 C21.1@41.944,55.156 ; J9.2 42.029,57.519 42.029,55.241 C21.1@41.944,55.156 ; v1(47.1,53.4) 47.1,53.454 47.203,53.557 47.203,54.334 ; J6.2@50.764,57.554 50.764,57.446 51.594,56.616 51.594,55.194 C18.1 51.449,55.049 51.449,54.4 ; v1(63,55.13) 62.946,55.13 62.846,55.03 62.805,55.03 62.122,54.347 53.517,54.347 53.417,54.247 52.383,54.247 52.377,54.253 48.095,54.253 48.088,54.247 47.54,54.247 47.387,54.4 42.049,54.4 ; 32.4,54.4 35.694,54.4 ; 35.694,54.4 39.93,54.4 39.983,54.347 41.017,54.347 41.07,54.4 42.049,54.4 ; C21.1@41.944,55.156 42.049,55.051 42.049,54.4
+5V: C1.1 C7.2 D1.5 J1.1 LED1.1 U1.1 U1.3 | length 14.1
  Top Layer w0.4: D1.5 62.05,60.65 62.15,60.75 J1.1 ; D1.5@62.1,60.7 63.5,60.7 C1.1 63.6,58.9 ; C7.2@63.65,57.65 63.65,57.834 63.6,57.884 63.6,58.9 ; C7.2 63.975,57.425 65.45,57.425 U1.3@65.55,57.525 ; LED1.1 63.7,58.8 63.6,58.9 ; U1.3@65.45,57.65 65.55,57.55 U1.3@65.55,57.525 ; U1.1 67.35,57.25 67.35,56.809 67.203,56.663 67.203,56.658 66.745,56.2 66.255,56.2 65.797,56.658 65.797,56.663 65.65,56.809 65.65,57.25 U1.3 U1.3@65.55,57.525
+5VP: C10.2 C12.2 C20.2 U2.5 U4.10 U4.16 U6.10 U6.16 | length 42.8
  Top Layer w0.4: U6.10 27.93,46.425 28.905,47.4 34.575,47.4 35.55,46.425 U6.16 35.55,45.521 35.8,45.271 C20.2 35.8,40.45 ; U2.5 31.95,40.35 33.35,40.35 33.5,40.5 C10.2 33.65,40.45 35.8,40.45 ; U4.10 39.425,46.4 40.128,47.103 46.342,47.103 47.045,46.4 47.045,45.496 47.3,45.241 47.3,44.4 C12.2@47.2,44.3 ; C12.2 43.45,40.45 35.8,40.45
+16V: C2.1 C3.1 C4.1 C5.1 C9.2 C13.1 C14.1 C15.1 C16.1 C22.1 C23.1 C24.1 C25.1 J15.1 Q1.1 Q1.2 Q1.3 U2.1 U2.3 U3.4 U5.4 U7.4 | length 94.8
  Top Layer w0.6: U2.3 29.375,38.35 29.522,38.497 29.883,38.497 30.178,38.792 30.178,39.822 29.75,40.25 U2.1 ; C9.2 C9.2@30.4,36.4
  Top Layer w0.8: 29.375,37.425 U2.3@29.375,38.35
  Top Layer w1: 29.375,37.425 C9.2@30.4,36.4
  Top Layer w2: J15.1 23.544,35.348 27.274,35.348 27.572,35.646 30.093,35.646 30.247,35.8 30.247,34.627 30.4,34.474 30.4,31.165 ; Q1.2@28,31.165 30.4,31.165 ; 33,31.165 30.4,31.165
  Bottom Layer w1: C2.1 33.412,28.387 36.388,28.387 C3.1 36.6,28.2 v3(38,28.2) 39.4,28.2 C4.1 C5.1 ; C13.1 48.372,28.375 v3(48.4,28.347) ; C14.1@48.4,28.375 C14.1 50.5,28.375 C15.1@51.4,28.375 ; v3(51.4,28.347) C15.1@51.4,28.375 ; C16.1 C15.1 C15.1@51.4,28.375 ; C22.1 58.212,28.387 60.988,28.387 C23.1 62.45,28.375 C24.1 63.912,28.387 66.688,28.387 C25.1
  Bottom Layer w2: 32.179,31.177 37.969,31.177 ; v3(38,28.2) 37.969,28.231 37.969,31.177 ; 50.5,28.375 50.4,28.475 50.4,31.177 ; v3@62.45,28.375 62.377,28.448 62.377,31.177 50.4,31.177 ; 37.969,31.177 50.4,31.177
  other v1: 32,30.7 32.8,30.7 32,31.6 32.8,31.6
  other v3: 36.301,28.209 39.201,28.209 61,28.3 62.45,28.3 63.9,28.3 49.9,28.325
ENCA_M1: J6.3 U8.25 | length 14
  Top Layer w0.3: J6.3 50.584,61.184 50.832,61.184 51.008,61.008 51.008,59.137 52.973,57.172 53.907,57.172 54.402,57.667 54.651,57.667 55.25,57.068 55.972,56.346 55.972,53.897 U8.25
ENCA_M2: J9.3 U8.27 | length 19.9
  Top Layer w0.3: J9.3 40.8,56.776 41.048,56.528 48.555,56.528 53.33,51.753 54.404,51.753 54.657,51.5 U8.27
ENCA_M3: J12.3 U8.29 | length 29.9
  Top Layer w0.3: J12.3 32.1,56.6 32.9,55.8 36.9,55.8 38,54.7 43.9,54.7 44.597,55.397 48.192,55.397 53.192,50.397 54.102,50.397 54.427,50.072 54.486,50.072 54.657,49.9 U8.29
ENCB_M1: J6.4 U8.26 | length 9.1
  Top Layer w0.3: J6.4 48.516,57.56 53.728,52.348 54.5,52.348 55.127,52.348 U8.26
ENCB_M2: J9.4 U8.28 | length 18.9
  Top Layer w0.3: J9.4 39.633,57.457 39.633,56.667 40.4,55.9 48.4,55.9 53.4,50.9 54.457,50.9 54.657,50.7 U8.28
ENCB_M3: J12.4 U8.30 | length 28.7
  Top Layer w0.3: J12.4 30.83,57.274 31.128,56.976 31.128,56.861 32.692,55.297 36.503,55.297 37.603,54.197 44.108,54.197 44.805,54.894 47.983,54.894 52.983,49.894 53.006,49.894 53.269,49.631 54.11,49.631 54.466,49.275 54.482,49.275 54.657,49.1 U8.30
GND: C1.2 C7.1 C8.1 C11.2 C18.2 C19.2 C21.2 C27.2 C28.2 C29.2 C30.2 C31.2 D1.2 J1.5 J1.S1 J1.S2 J1.S3 J1.S4 J1.S5 J1.S6 J6.1 J9.1 J11.03 J11.05 J11.09 J12.1 R1.2 R11.1 R12.1 R13.1 R14.1 U1.2 U4.2 U4.8 U6.2 U6.8 | length 3.9
  Top Layer w0.2: 66.1,58.255 66.1,58.358
  Top Layer w0.3: 66.1,58.255 66.35,58.005 66.35,57.5 U1.2
  Top Layer w0.4: U6.2 34.29,51.46 34.29,53.39 C11.2 ; U4.2 45.775,51.71 U4.2@45.9,51.835 ; C1.2 C1.2@65.1,60.7 ; R1.2@66.8,60.7 R1.2
  other v1: 55.4,41 60.8,41.2 68.3,41.3 57.7,42.9 71.6,43.6 51.3,44.5 71.7,45.5 71.7,47.6 71.8,49.6 38.1,51.8 19.3,52.3 22.7,52.3 66.8,52.3 26.6,52.8 69.4,53.1 45.6,53.14 34.3,53.5 52.9,55.1 64.4,55.1 30.9,55.2 39.6,55.4 20.7,55.8 54.9,56.1 60.7,56.3 69.4,56.4 20.8,58.3 69.3,58.7 55,59 20.8,59.5 57.9,59.7 46,60.4 73.4,60.4 37.1,60.5 65.3,60.6 66.9,61.7 58.8,61.9 27.7,62.7 56.2,63 37.9,64.1 48.7,64.2 22.5,64.4 69.7,64.5
  other v2: 55.9,42.9 52.8,46.4
GPIO_LED1: LED2.1 U8.10 | length 3.1
  Top Layer w0.3: U8.10@63.107,48.3 U8.10 63.673,48.348 64.648,48.348 65.2,48.9 65.2,49.45 LED2.1
GPIO_LED2: LED3.1 U8.9 | length 1.8
  Top Layer w0.3: U8.9 63.673,47.548 65.298,47.548 LED3.1
GPIO_LED3: LED4.1 U8.8 | length 3.6
  Top Layer w0.3: U8.8 62.2,45.715 62.315,45.6 LED4.1
GPIO_LED4: LED5.1 U8.6 | length 6.1
  Top Layer w0.3: U8.6 60.6,45.557 60.725,45.432 60.725,45.375 61.492,44.608 64.342,44.608 LED5.1
M1_DIR_HV: U3.10 U4.13 | length 33.6
  Top Layer w0.3: v1(43.2,43.6) 43.218,43.617 43.218,45.958 U4.13 ; 64,30 64.2,30.2 v1(66.4,30.2)
  Bottom Layer w0.3: v1(43.2,43.6) 44.4,42.4 47.95,42.4 55.553,34.797 61.403,34.797 64.85,31.35 65.25,31.35 v1(66.4,30.2)
M1_DIR_LV: U4.4 U8.13 | length 23.2
  Top Layer w0.3: U4.4 43.235,51.85 43.964,52.579 44.2,52.579 v1(44.257,52.636) ; v1(61.9,51.4) 62.6,50.7 U8.13
  Bottom Layer w0.3: v1(44.257,52.636) 44.314,52.579 44.525,52.579 45.411,51.693 49.171,51.693 49.668,52.19 51.522,52.19 51.529,52.184 54.271,52.184 54.278,52.19 55.074,52.19 56.521,50.744 57.233,50.744 57.629,50.347 58.171,50.347 58.553,50.729 58.553,50.753 59.2,51.4 v1(61.9,51.4)
M1_PWM_HV: U3.9 U4.14 | length 34.5
  Top Layer w0.3: v1(44.5,44.3) 44.502,44.302 44.502,45.973 U4.14 ; U3.9 63.853,29.372 66.672,29.372 v1(67.5,30.2)
  Bottom Layer w0.3: v1(44.5,44.3) 45.897,42.903 48.158,42.903 55.761,35.3 61.8,35.3 65.247,31.853 65.847,31.853 v1(67.5,30.2)
M1_PWM_LV: U4.3 U8.18 | length 21.6
  Top Layer w0.3: U4.3 44.505,51 45.155,50.35 47.679,50.35 48.9,51.571 v1(48.9,52.346) ; v1(57.9,51) 57.957,51.057 58.657,51.057 61.352,53.752 61.352,54.477 U8.18
  Bottom Layer w0.3: v1(48.9,52.346) 48.981,52.346 49.329,52.694 51.731,52.694 51.737,52.687 54.063,52.687 54.069,52.694 55.283,52.694 56.729,51.247 57.572,51.247 57.819,51 v1(57.9,51)
M2_DIR_HV: U4.11 U5.10 | length 25
  Top Layer w0.3: U4.11 40.695,43.605 v2(40.7,43.6) ; U5.10@51.306,29.925 51.306,30.575 53.481,32.75 53.481,33.481 v2(53.5,33.5)
  Bottom Layer w0.3: v2(40.7,43.6) 43,41.3 47.627,41.3 53.5,35.427 v2(53.5,33.5)
M2_DIR_LV: U4.6 U8.12 | length 26.2
  Top Layer w0.3: U4.6 40.698,51.428 40.698,52.579 40.954,52.836 41.043,52.836 v1(41.1,52.894) ; v1(60.6,50.1) 60.681,50.1 60.881,49.9 U8.12
  Bottom Layer w0.3: v1(41.1,52.894) 41.1,52.812 41.247,52.666 41.247,52.568 41.247,52.476 41.629,52.094 43.894,52.094 44.798,51.189 49.379,51.189 49.877,51.687 51.314,51.687 51.32,51.681 54.48,51.681 54.486,51.687 54.866,51.687 56.313,50.24 57.024,50.24 57.421,49.844 60.274,49.844 60.531,50.1 v1(60.6,50.1)
M2_PWM_HV: U4.12 U5.9 | length 25.8
  Top Layer w0.3: U4.12 41.982,45.958 41.982,43.617 v2(42,43.6) ; U5.9@51.45,29.422 51.746,29.422 54.8,32.476 v2(54.8,33.5)
  Bottom Layer w0.3: v2(42,43.6) 43.797,41.803 47.835,41.803 54.8,34.838 v2(54.8,33.5)
M2_PWM_LV: U4.5 U8.19 | length 23.1
  Top Layer w0.3: v1(41.9,52.747) 41.932,52.714 41.932,51.458 U4.5 ; v1(57,51.9) 58.6,51.9 60.475,53.775 60.475,53.882 60.6,54.007 U8.19
  Bottom Layer w0.3: v1(41.9,52.747) 42.443,53.29 44.528,53.29 44.929,52.889 44.929,52.887 45.572,52.244 47.579,52.244 48.532,53.197 51.939,53.197 51.945,53.19 53.855,53.19 53.861,53.197 55.703,53.197 v1(57,51.9)
M3_DIR_HV: U6.13 U7.10 | length 24.4
  Top Layer w0.25: U7.10 39.734,29.775 42.7,32.741 v1(42.7,35.4)
  Top Layer w0.3: U6.13 31.74,43.16 v1(33.2,41.7)
  Bottom Layer w0.3: v1(33.2,41.7) 36.4,41.7 v1(42.7,35.4)
M3_DIR_LV: U6.4 U8.11 | length 38
  Top Layer w0.3: v1(31.5,53.397) 31.5,53.316 31.74,53.076 U6.4 ; v1(61.4,48.2) 62.3,49.1 U8.11
  Bottom Layer w0.3: v1(31.5,53.397) 31.557,53.339 31.557,53.147 32.365,52.34 36.179,52.34 36.883,53.044 40.271,53.044 40.447,52.868 40.447,52.623 40.744,52.326 40.744,52.268 41.421,51.59 43.685,51.59 44.589,50.686 49.587,50.686 50.085,51.184 51.105,51.184 51.112,51.178 54.664,51.178 56.501,49.34 57.213,49.34 58.659,49.34 59.8,48.2 v1(61.4,48.2)
M3_PWM_HV: U6.14 U7.9 | length 25.1
  Top Layer w0.25: U7.9 39.875,29.275 43.6,33 v1(43.6,35.5)
  Top Layer w0.3: U6.14 33.01,43.09 33.222,42.878 33.441,42.878 33.819,42.5 v1(33.9,42.5)
  Bottom Layer w0.3: v1(33.9,42.5) 36.312,42.5 37.097,41.714 37.386,41.714 v1(43.6,35.5)
M3_PWM_LV: U6.3 U8.20 | length 32.6
  Top Layer w0.3: v1(32.4,53.397) 33.005,52.792 33.005,51.455 U6.3 ; v1(56.9,53) 58.9,53 59.675,53.775 59.675,53.882 59.8,54.007 U8.20
  Bottom Layer w0.3: v1(32.4,53.397) 32.954,52.843 35.971,52.843 36.921,53.793 46.271,53.793 46.447,53.617 46.447,53.129 46.829,52.747 47.371,52.747 48.324,53.7 52.147,53.7 52.154,53.694 53.646,53.694 53.653,53.7 56.2,53.7 v1(56.9,53)
NetJ2_1: J2.1 U3.7
NetJ3_1: J3.1 U3.5
NetJ4_1: J4.1 U5.7
NetJ5_1: J5.1 Q1.5 | length 4.8
  Top Layer w0.6: Q1.5@21.643,33.7 22.233,33.11 Q1.5
  Top Layer w1: J5.1 J5.1@19.864,32.336 ; Q1.5@21.843,32.336 22.233,31.946 Q1.5
NetJ7_1: J7.1 U5.5
NetJ10_1: J10.1 U7.7
NetJ13_1: J13.1 U7.5
NetLED1_2: LED1.2 R1.1 | length 2.4
  Top Layer w0.4: LED1.2 68.15,60.1 68.15,60.35 68.3,60.5 R1.1
NetLED2_2: LED2.2 R11.2 | length 1.8
  Top Layer w0.3: LED2.2 R11.2
NetLED3_2: LED3.2 R12.2 | length 1.8
  Top Layer w0.3: LED3.2 R12.2
NetLED4_2: LED4.2 R13.2 | length 1.8
  Top Layer w0.3: LED4.2 R13.2
NetLED5_2: LED5.2 R14.2 | length 1.9
  Top Layer w0.3: LED5.2 R14.2
NetR2_2: R2.2 U3.2 | length 2.5
  Top Layer w0.3: R2.2 59.2,30.5 59.3,30.5 59.4,30.5 60.024,29.876 60.024,29.776 60.425,29.375 U3.2
NetR3_1: R3.1 U3.13 | length 2.1
  Top Layer w0.25: U3.13 R3.1
NetR4_1: R4.1 U3.12 | length 2.7
  Top Layer w0.2: R4.1@63.9,32.5 R4.1
  Top Layer w0.25: U3.12 62.7,31.3 R4.1@63.9,32.5
NetR5_2: R5.2 U5.2 | length 2.3
  Top Layer w0.25: R5.2 46.7,30.3 46.8,30.3 47.7,29.4 U5.2
NetR6_1: R6.1 U5.13 | length 1.7
  Top Layer w0.25: U5.13 R6.1@49.65,32.05
  Top Layer w0.3: R6.1 R6.1@49.65,32.05
NetR7_1: R7.1 U5.12 | length 2.3
  Top Layer w0.25: U5.12 50.15,30.85 51.075,31.775 51.075,31.875 51.3,32.1 R7.1
NetR8_2: R8.2 U7.2 | length 2.5
  Top Layer w0.3: R8.2 35.7,29.551 35.954,29.297 36.378,29.297 U7.2
NetR9_1: R9.1 U7.13 | length 2.4
  Top Layer w0.25: R9.1 37.55,32.65 U7.13
NetR10_1: R10.1 U7.12 | length 3.2
  Top Layer w0.2: R10.1@39.5,32.7 R10.1
  Top Layer w0.25: U7.12 38.05,31.25 39.5,32.7 R10.1@39.55,32.7
NRST: C31.1 J11.10 U8.4 | length 44.4
  Top Layer w0.3: J11.10 27.055,55.98 28.236,55.98 28.256,56 31.277,56 32.483,54.794 36.295,54.794 37.395,53.694 44.317,53.694 45.014,54.39 47.775,54.39 51.35,50.815 51.35,45.95 55.103,42.197 56.497,42.197 56.897,42.597 56.897,43.396 56.9,43.4 56.9,43.6 57.6,44.3 58.6,44.3 59,44.7 U8.4
PGND: C2.2 C3.2 C4.2 C5.2 C9.1 C10.1 C12.1 C13.2 C14.2 C15.2 C16.2 C20.1 C22.2 C23.2 C24.2 C25.2 J8.1 J14.1 J16.1 Q1.4 R2.1 R3.2 R4.2 R5.1 R6.2 R7.2 R8.1 R9.2 R10.2 U2.2 U3.6 U3.8 U3.11 U3.14 U4.9 U4.15 U5.6 U5.8 U5.11 U5.14 U6.9 U6.15 U7.6 U7.8 U7.11 U7.14 | length 32.6
  Top Layer w0.2: U7.11 38.975,30.3 41.3,32.625 v1(41.3,32.7) ; U7.8 40.2,28.775 40.348,28.923 40.787,28.923 41.023,29.16 41.023,29.523 v1(41.1,29.6)
  Bottom Layer w1: C2.2 33.412,25.638 36.388,25.638 C3.2 C4.2 C5.2 ; C13.2 48.65,25.625 48.8,25.775 v1(48.8,25.9) ; C14.2@48.8,25.8 48.925,25.8 C14.2 C15.2 C16.2 ; C22.2 58.212,25.638 60.988,25.638 C23.2 C24.2 63.912,25.638 66.688,25.638 C25.2
  other v1: 25.5,25.5 31.7,25.7 36.8,26 39.1,26 61.3,26.1 63.7,26.1 38,26.2 51.2,26.2 62.4,26.2 50.4,26.5 17.2,27 18.1,27 19,27 19.9,27 71.4,27.7 17.2,27.9 18.1,27.9 19,27.9 19.9,27.9 17.2,28.8 18.1,28.8 19,28.8 19.9,28.8 56.4,29.5 17.2,29.7 18.1,29.7 19,29.7 19.9,29.7 64.2,31.1 24.9,31.8 33.7,32.8 46.7,33 59.3,33 26,33.7 50.5,34.6 70.7,34.7 39.7,35.1 63.1,35.1 32.2,35.2 38.6,36.3 35.797,36.758 19,36.9 56.2,37.4 33.6,38.1 27.5,38.6 40.1,41.6 29.7,41.9 38.7,42.9 34.3,44.1 45.8,44.1 17.3,44.5 18.2,44.5 19.1,44.5 20,44.5 38.156,44.672 26.6,44.7 17.3,45.4 18.2,45.4 19.1,45.4 20,45.4 17.3,46.3 18.2,46.3 19.1,46.3 20,46.3 17.3,47.2 18.2,47.2 19.1,47.2 20,47.2 23.6,47.2
SLEEP_HV: U3.3 U5.3 U6.11 U7.3 | length 58.8
  Top Layer w0.2: v1(29,44.408) 29.2,44.608 U6.11 ; v2(34.7,33.2) 34.7,29.91 35.81,28.8 36.375,28.8 U7.3 ; v2(44.8,32.7) 44.8,30.7 46.575,28.925 48.475,28.925 U5.3 ; v2(57.7,32.8) 57.7,30.671 59.496,28.875 U3.3
  Bottom Layer w0.2: v1(29,44.408) 36.4,37.008 36.4,34.9 v2(34.7,33.2) 39.301,33.2 39.404,33.303 43.024,33.303 43.647,32.68 44.78,32.68 45.703,33.603 51.56,33.603 52.363,32.8 v2(57.7,32.8)
SLEEP_LV: U6.6 U8.31 | length 30.3
  Top Layer w0.3: U6.6 29.2,53.119 29.3,53.219 v1(29.3,53.3) ; v1(52.831,49.147) 53.677,48.3 U8.31
  Bottom Layer w0.3: v1(29.3,53.3) 29.875,52.725 29.875,52.602 30.176,52.3 30.961,52.3 32.115,51.147 38.371,51.147 38.933,50.584 43.268,50.584 44.172,49.68 50.004,49.68 50.496,50.171 51.806,50.171 v1(52.831,49.147)
SWCLK: J11.04 U8.24 | length 36.7
  Top Layer w0.4: J11.04 26.935,59.47 29.349,59.47 31.879,62 53.851,62 55.8,60.051 55.8,59.194 55.803,59.191 55.803,57.297 56.6,56.5 U8.24
SWDIO: J11.02 U8.23 | length 37.6
  Top Layer w0.4: J11.02 26.935,60.74 29.64,60.74 31.6,62.7 52.405,62.7 52.501,62.603 54.101,62.603 56.406,60.298 56.406,57.594 57.278,56.722 57.278,55.203 57.278,55.137 57.4,55.016 U8.23
THR_PWM_HV: J14.2 U6.12 | length 8.2
  Top Layer w0.3: J14.2 30.47,44.4 U6.12 U6.12@30.435,45.965
THR_PWM_LV: U6.5 U8.7 | length 37
  Top Layer w0.3: U6.5 30.485,51.465 30.485,53.185 v1(30.5,53.2) ; v1(58.4,47.4) 60.7,47.4 61.275,46.825 61.275,46.718 61.4,46.593 U8.7
  Bottom Layer w0.3: v1(30.5,53.2) 30.557,53.143 30.77,53.143 30.806,53.106 30.867,53.106 32.137,51.836 36.387,51.836 37.091,52.54 39.818,52.54 40.24,52.118 40.24,52.059 41.213,51.087 43.477,51.087 44.381,50.183 49.796,50.183 50.294,50.681 50.897,50.681 50.903,50.674 54.455,50.674 56.293,48.837 56.934,48.837 58.371,47.4 v1(58.4,47.4)
USB_D_N: D1.4 J1.2 U8.21 | length 11.2
  Top Layer w0.26: U8.21 59,55.053 58.832,55.222 58.832,55.822 60.731,57.722 60.731,58.3 61.012,58.58 61.68,58.58 D1.4 61.68,58.92 61.012,58.92 60.731,59.2 60.731,60.798 61.406,61.473 61.406,61.93 61.43,61.953 61.43,62.73 J1.2
USB_D_P: D1.3 J1.3 U8.22 | length 11.2
  Top Layer w0.26: U8.22 58.2,55.053 58.369,55.222 58.369,56.014 60.269,57.914 60.269,58.3 59.988,58.58 59.32,58.58 D1.3 59.32,58.92 59.988,58.92 60.269,59.2 60.269,60.99 60.944,61.665 60.944,61.93 60.92,61.953 60.92,62.73 J1.3
pads on no net: D1.1 J1. J1.4 J6. J9. J11.06 J11.07 J11.08 J12. J14. J14.3 J14.4 U1.4 U2.4 U3.1 U4.7 U5.1 U6.7 U7.1 U8.2 U8.3 U8.5 U8.14 U8.16 U8.32
copper on no net:
  other v1: 44.4,29.4

## Polygon pours and split planes (outlines as drawn)
GND on Top Layer "GND_L01_P196" (solid, remove dead copper, pour order 196): 17.4,50.702 24.6,50.702 cw(c24.6,49.6) 25.379,50.379 26.379,49.379 47.188,49.379 cw(c47.2,49.355) 47.221,49.371 50.179,47.079 cw(c49.4,46.3) 50.502,46.3 50.502,44.556 54.756,40.302 74.4,40.302 74.4,65.4 17.4,65.4
NetJ5_1 on Top Layer "NETJ5_1_L01_P194" (solid, pour order 194): 20.5,35.7 22.2,34 23.1,34 23.1,29.6 21.4,29.6 21.4,30.8 20.2,32 20.2,35.7
+16V on Top Layer "+16V_L01_P188" (solid, pour order 188): 26.5,32.9 26.5,29.5 28.5,29.5 28.6,29.6 28.6,32.9
NetJ7_1 on Top Layer "NETJ7_1_L01_P189" (solid, pour order 189): 48.4,27.8 45.3,27.8 45.3,23.8 48.4,23.8 48.4,27.4
NetJ10_1 on Top Layer "NETJ10_1_L01_P190" (solid, pour order 190): 39.507,27.692 42.607,27.692 42.607,23.692 39.507,23.692 39.507,27.292
NetJ13_1 on Top Layer "NETJ13_1_L01_P191" (solid, pour order 191): 36.1,27.7 33,27.7 33,23.7 36.1,23.7 36.1,27.3
NetJ4_1 on Top Layer "NETJ4_1_L01_P192" (solid, pour order 192): 54.6,27.8 51.5,27.8 51.5,23.8 54.6,23.8 54.6,27.4
NetJ2_1 on Top Layer "NETJ2_1_L01_P193" (solid, pour order 193): 67.1,27.8 64,27.8 64,23.8 67.1,23.8 67.1,27.4
NetJ3_1 on Top Layer "NETJ3_1_L01_P195" (solid, pour order 195): 61.053,27.825 57.953,27.825 57.953,23.825 61.053,23.825 61.053,27.425
PGND on Top Layer "PGND_L01_P198" (solid, remove dead copper, pour order 198): 17.4,20.9 17.4,48.498 24.144,48.498 24.821,47.821 ccw(c25.6,48.6) 25.6,47.498 46.644,47.498 48.298,45.844 48.298,44.1 ccw(c49.4,44.1) 48.621,43.321 53.521,38.421 ccw(c54.3,39.2) 54.3,38.098 74.4,38.098 74.4,20.9
PGND on Bottom Layer "PGND_L04_P203" (solid, pour order 203): 17.4,20.9 17.4,48.498 24.144,48.498 24.821,47.821 ccw(c25.6,48.6) 25.6,47.498 46.644,47.498 48.298,45.844 48.298,44.1 ccw(c49.4,44.1) 48.621,43.321 53.521,38.421 ccw(c54.3,39.2) 54.3,38.098 74.4,38.098 74.4,20.9
GND on Bottom Layer "GND_L04_P202" (solid, pour order 202): 17.4,50.702 24.6,50.702 cw(c24.6,49.6) 25.379,50.379 26.056,49.702 47.1,49.702 cw(c47.1,48.6) 47.879,49.379 50.179,47.079 cw(c49.4,46.3) 50.502,46.3 50.502,44.556 54.756,40.302 74.4,40.302 74.4,65.4 17.4,65.4
PGND on GND2 "PGND_L03_P201" (solid, pour order 201): 17.4,20.9 17.4,48.498 24.144,48.498 24.821,47.821 ccw(c25.6,48.6) 25.6,47.498 46.644,47.498 48.298,45.844 48.298,44.1 ccw(c49.4,44.1) 48.621,43.321 53.521,38.421 ccw(c54.3,39.2) 54.3,38.098 74.4,38.098 74.4,20.9
GND on GND2 "GND_L03_P200" (solid, pour order 200): 17.4,50.702 24.6,50.702 cw(c24.6,49.6) 25.379,50.379 26.056,49.702 47.1,49.702 cw(c47.1,48.6) 47.879,49.379 50.179,47.079 cw(c49.4,46.3) 50.502,46.3 50.502,44.556 54.756,40.302 74.4,40.302 74.4,65.4 17.4,65.4
GND on GND1 "GND_L02_P197" (solid, pour order 197): 17.4,50.702 24.6,50.702 cw(c24.6,49.6) 25.379,50.379 26.056,49.702 47.1,49.702 cw(c47.1,48.6) 47.879,49.379 50.179,47.079 cw(c49.4,46.3) 50.502,46.3 50.502,44.556 54.756,40.302 74.4,40.302 74.4,65.4 17.4,65.4
PGND on GND1 "PGND_L02_P199" (solid, pour order 199): 17.4,20.9 17.4,48.498 24.144,48.498 24.821,47.821 ccw(c25.6,48.6) 25.6,47.498 46.644,47.498 48.298,45.844 48.298,44.1 ccw(c49.4,44.1) 48.621,43.321 53.521,38.421 ccw(c54.3,39.2) 54.3,38.098 74.4,38.098 74.4,20.9

## Silkscreen, mask and mechanical layers (free items; w line width, h text height)
Top Overlay:
  text "ENC_M3" at 29.8,62.367 h1
  text "ENC_M2" at 38.5,62.367 h1
  text "ENC_M1" at 47,62.367 h1
  text "PROG" at 19.5,59.5 h1 r270
  text "USB_LED" at 68.6,58.367 h1
  text "DEBUG_LED" at 71.467,50.9 h1 r270
  text "THR-" at 21.5,47.6 h1 r270
  text "T_PWM" at 26.6,43.167 h1
  text "Sauna-Madis" at 50.9,38.3 h2
  text "BAT-" at 21.4,28.6 h1 r270
  text "M1" at 37.2,22.9 h1
  text "M2" at 49.2,22.9 h1
  text "M3" at 61.7,22.9 h1
Mechanical 1:
  the board outline again, w0.2
Top Assembly:
  circle w0.1: c72.8,22.5 r3
  circle w0.1: c72.8,63.8 r3
  circle w0.1: c19,22.5 r3
  circle w0.1: c19,63.8 r3
  lines w0.254: 15.9,61.9 75.9,61.9 ; 15.929,24.424 75.929,24.424 ; 20.9,19.5 20.9,66.9 ; 70.9,19.5 70.9,66.8